# Altium PCB remote.PcbDoc (part 4 of 4)
Units mil, origin at the board's own origin, x right, y up, seen from the top; angles counter-clockwise.
Board outline 1653.54 x 3582.68 mil, 2 copper layers (Top Layer, Bottom Layer); 71 components, 53 nets, 248 pads, 250 vias.
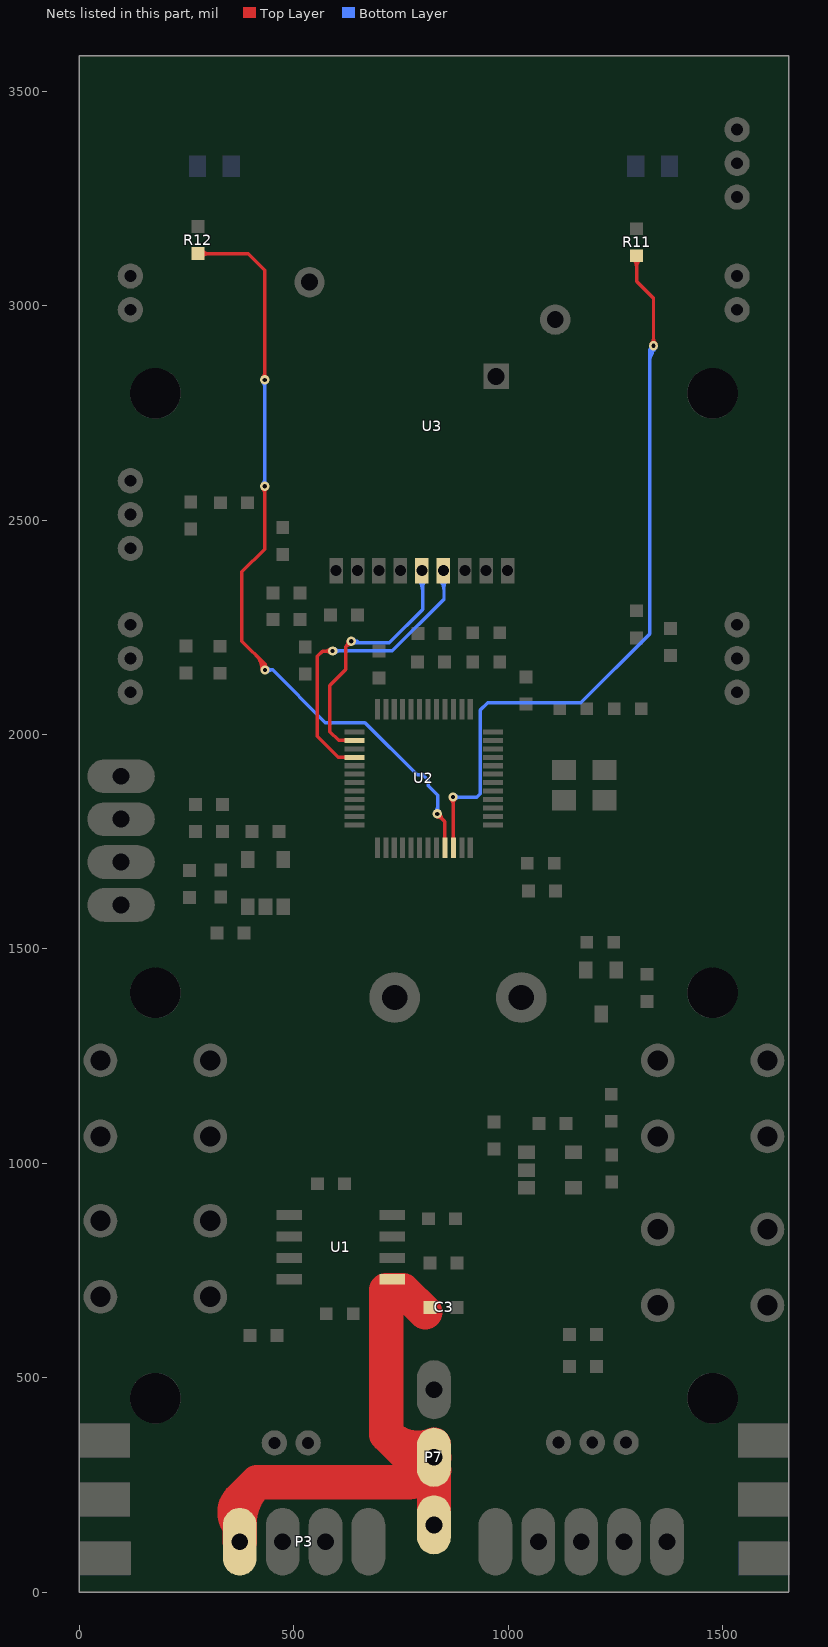
[diagram p4: the nets of this part, all layers, seen from the top]

## Via types
v1: diameter 21.65, hole 9.84, Top Layer to Bottom Layer, tented both sides, 241 vias
v2: diameter 21.65, hole 9.84, Top Layer to Bottom Layer, 9 vias

## Nets (pads, with @x,y where several pads share a name; then routed paths per layer and width w, separated by ;. In a path a pad name is that pad's centre, name@x,y a point inside that pad or via, vN(x,y) a via of type N, cw(c..) or ccw(c..) an arc to the next point about the centre after c; other vN are vias at no path point) (continued)
SPI2-MOSI: U2.28 U3.5 | length 910.9
  Top Layer w8: v1@590.55,2196.85 587.6,2193.9 566.93,2193.9 555.12,2182.09 555.12,1995.84 604.1,1946.85 U2.28@641.73,1946.85 ; 571.69,2193.9 ccw(c571.69,2213.74) 585.72,2199.71 cw(c571.69,2213.74) 571.69,2193.9 ; 576.45,2193.9 cw(c576.45,2180.78) 585.72,2190.05 ccw(c576.45,2180.78) 576.45,2193.9
  Bottom Layer w8: v1(590.55,2194.88) 729.33,2194.88 850.2,2315.75 U3.5@850.2,2389.57 ; 607.03,2194.88 cw(c607.03,2211.36) 595.38,2199.71 ccw(c607.03,2211.36) 607.03,2194.88 ; 607.03,2194.88 ccw(c607.03,2178.4) 595.38,2190.05 cw(c607.03,2178.4) 607.03,2194.88 ; U3.5@840.31,2359.8 cw(c816.46,2335.95) 850.2,2335.95 ccw(c816.46,2335.95) U3.5@840.31,2359.8 ; 850.2,2343.55 cw(c873.18,2343.55) 856.93,2359.8 ccw(c873.18,2343.55) 850.2,2343.55
SPI2-SCK: U2.26 U3.4 | length 819
  Top Layer w8: 625.22,2210.75 cw(c635.83,2207.91) v1@633.62,2218.67 ; 627.09,2208.88 ccw(c624.25,2219.49) v1@635.01,2217.28 ; v1(633.86,2217.52) 621.06,2204.72 621.06,2151.57 583.66,2114.17 583.66,2006.89 604.33,1986.22 U2.26@641.73,1986.22 ; 622.2,2205.87 cw(c633.86,2194.21) 633.86,2210.69 ccw(c633.86,2194.21) 622.2,2205.87 ; 622.2,2205.87 ccw(c610.55,2217.52) 627.03,2217.52 cw(c610.55,2217.52) 622.2,2205.87
  Bottom Layer w8: v1(633.86,2217.52) 637.8,2213.58 722.33,2213.58 800.2,2291.45 U3.4@800.2,2389.57 ; v1@639.76,2214.09 cw(c645.49,2210.77) 648.8,2216.51 ; v1@638.69,2222.35 ccw(c659.84,2243.51) 659.84,2213.58 cw(c659.84,2243.51) v1@638.69,2222.35 ; U3.4@790.31,2359.8 cw(c766.46,2335.95) 800.2,2335.95 ccw(c766.46,2335.95) U3.4@790.31,2359.8 ; 800.2,2343.55 cw(c823.18,2343.55) 806.93,2359.8 ccw(c823.18,2343.55) 800.2,2343.55
TIM4_CH3: R12.2 U2.45 | length 2446.7
  Top Layer w8: R12.2@276.57,3121.06 393.7,3121.06 432.09,3082.68 v1(432.09,2826.77) ; v1@428.77,2155.9 ccw(c424.63,2161.02) 430.99,2162.72 ccw(c439.89,2165.11) v1@435.97,2156.77 ; v1(432.09,2578.74) 432.09,2432.09 378.94,2378.94 378.94,2217.52 433.07,2163.39 ; v1(433.07,2150.59) 433.07,2163.39 ; v1@833.5,1814.73 ccw(c844.25,1816.93) 841.41,1806.32 ; v1(834.65,1814.96) 852.36,1797.24 U2.45@852.36,1736.22 ; v1@834.88,1816.11 cw(c832.68,1805.35) 843.29,1808.19 ; 303.13,3121.06 cw(c303.13,3147.62) 284.35,3128.84 ccw(c303.13,3147.62) 303.13,3121.06 ; 303.13,3121.06 ccw(c303.13,3094.51) 284.35,3113.28 cw(c303.13,3094.51) 303.13,3121.06 ; 432.09,2562.26 cw(c448.57,2562.26) 436.91,2573.91 ccw(c448.57,2562.26) 432.09,2562.26 ; 432.09,2562.26 ccw(c415.61,2562.26) 427.26,2573.91 cw(c415.61,2562.26) 432.09,2562.26 ; 432.09,2843.25 cw(c415.61,2843.25) 427.26,2831.6 ccw(c415.61,2843.25) 432.09,2843.25 ; 432.09,2843.25 ccw(c448.57,2843.25) 436.91,2831.6 cw(c448.57,2843.25) 432.09,2843.25 ; 433.07,2163.39 cw(c424.49,2163.39) 429.27,2156.26 ccw(c424.49,2163.39) 433.07,2163.39 ; 433.07,2163.39 ccw(c441.65,2163.39) 436.87,2156.26 cw(c441.65,2163.39) 433.07,2163.39 ; 846.3,1803.31 cw(c857.95,1814.96) 841.47,1814.96 ccw(c857.95,1814.96) 846.3,1803.31 ; 846.3,1803.31 ccw(c834.65,1791.65) 834.65,1808.13 cw(c834.65,1791.65) 846.3,1803.31 ; 412.37,2184.09 cw(c378.87,2150.59) 426.24,2150.59 ccw(c378.87,2150.59) 412.37,2184.09 ; 426.03,2170.43 cw(c406.19,2150.59) 434.24,2150.59 ccw(c406.19,2150.59) 426.03,2170.43
  Bottom Layer w8: v1(432.09,2578.74) v1(432.09,2826.77) ; v1(433.07,2150.59) 450.56,2150.59 573.54,2027.61 666.06,2027.61 788,1905.67 800.95,1905.67 813.15,1893.47 813.15,1880.75 835.63,1858.27 835.63,1815.94 v1(834.65,1814.96) ; 432.09,2595.22 cw(c415.61,2595.22) 427.26,2583.57 ccw(c415.61,2595.22) 432.09,2595.22 ; 432.09,2595.22 ccw(c448.57,2595.22) 436.91,2583.57 cw(c448.57,2595.22) 432.09,2595.22 ; 432.09,2810.29 cw(c448.57,2810.29) 436.91,2821.94 ccw(c448.57,2810.29) 432.09,2810.29 ; 432.09,2810.29 ccw(c415.61,2810.29) 427.26,2821.94 cw(c415.61,2810.29) 432.09,2810.29 ; 449.55,2150.59 cw(c449.55,2167.07) 437.9,2155.42 ccw(c449.55,2167.07) 449.55,2150.59 ; 449.55,2150.59 ccw(c449.55,2134.11) 437.9,2145.76 cw(c449.55,2134.11) 449.55,2150.59 ; v1@829.82,1819.79 ccw(c815.79,1833.82) 835.63,1833.82 cw(c815.79,1833.82) v1@829.82,1819.79 ; 835.63,1829.07 ccw(c848.75,1829.07) 839.47,1819.79 cw(c848.75,1829.07) 835.63,1829.07
TIM4_CH4: R11.2 U2.46 | length 2149.3
  Top Layer w8: U2.46@872.05,1736.22 v1@872.05,1846.46 ; R11.2@1299.21,3116.14 1299.21,3056.1 1338.58,3016.73 v1(1338.58,2906.5) ; 1299.21,3089.59 cw(c1325.77,3089.59) 1306.99,3108.36 ccw(c1325.77,3089.59) 1299.21,3089.59 ; 1299.21,3089.59 ccw(c1272.66,3089.59) 1291.43,3108.36 cw(c1272.66,3089.59) 1299.21,3089.59 ; 1338.58,2922.98 cw(c1322.1,2922.98) 1333.76,2911.32 ccw(c1322.1,2922.98) 1338.58,2922.98 ; 1338.58,2922.98 ccw(c1355.06,2922.98) 1343.41,2911.32 cw(c1355.06,2922.98) 1338.58,2922.98 ; v1@866.24,1849.5 cw(c852.21,1835.48) 872.05,1835.48 ccw(c852.21,1835.48) v1@866.24,1849.5 ; 872.05,1840.22 cw(c885.17,1840.22) 875.89,1849.5 ccw(c885.17,1840.22) 872.05,1840.22
  Bottom Layer w8: v1@872.05,1853.35 926.18,1853.35 935.04,1862.2 935.04,2057.09 951.77,2073.82 1169.18,2073.82 1329.72,2234.37 1329.72,2897.64 v1(1338.58,2906.5) ; 1330.33,2894.47 cw(c1339.37,2889.26) v1@1338.89,2899.68 ; 1330.73,2895.16 ccw(c1319.81,2901.47) v1@1331.99,2904.73 ; v1@1332.82,2902.83 cw(c1317.5,2893.1) 1333.22,2884.02 ; v1@1339.57,2907.13 cw(c1330.07,2901.08) 1339.82,2895.45 ; v1@875.89,1849.5 cw(c885.17,1840.23) 885.17,1853.35 ccw(c885.17,1840.23) v1@875.89,1849.5 ; v1@875.89,1859.16 ccw(c889.92,1873.19) 889.92,1853.35 cw(c889.92,1873.19) v1@875.89,1859.16 ; 1329.72,2868.63 cw(c1376.45,2868.63) 1343.41,2901.67 ccw(c1376.45,2868.63) 1329.72,2868.63 ; 1329.72,2887.94 cw(c1357.14,2887.94) 1337.75,2907.33 ccw(c1357.14,2887.94) 1329.72,2887.94
  other v1: 871.06,1854.33
VIN: C3.1 P3.1 P7.1 P7.2 U1.5 | length 2449.5
  Top Layer w80: P3.1@374.02,118.11 374.02,216.54 ; C3.1@806.32,652.78 754.37,704.72 715.55,704.72 715.55,368.11 ; P7.1@826.77,157.48 P7.2@826.77,314.96 ; 374.02,216.54 ccw(c403.99,186.56) 373.56,157.04 cw(c403.99,186.56) 374.02,216.54 ; 374.02,216.54 414.37,256.89 ; 414.37,256.89 ccw(c513.3,157.95) 373.39,157.48 cw(c513.3,157.95) 414.37,256.89 ; 414.37,256.89 768.7,256.89 ; 715.55,368.11 ccw(c790.1,442.65) 826.99,343.9 cw(c790.1,442.65) 715.55,368.11 ; 715.55,368.11 768.7,314.96 ; 768.7,256.89 ccw(c768.7,331.88) 827.26,285.04 cw(c768.7,331.88) 768.7,256.89 ; 768.7,256.89 P7.2@826.77,314.96 ; 768.7,314.96 ccw(c798.19,344.44) 827.21,314.51 cw(c798.19,344.44) 768.7,314.96 ; 768.7,314.96 P7.2@826.77,314.96 ; 759.38,256.89 ccw(c759.38,352.82) 827.22,284.99 cw(c759.38,352.82) 759.38,256.89 ; 777.44,265.63 cw(c826.77,216.3) 826.77,286.06 ccw(c826.77,216.3) 777.44,265.63
pads on no net: SP1.4 SP2.4 Y1.2 Y1.4

## Polygon pours and split planes (outlines as drawn)
GND on Top Layer "Top Layer-No Net" (solid, remove dead copper, pour order 4): 0,3582.68 1653.54,3582.68 1653.54,0.99 1653.54,0.98 1652.56,0 0,0
GND on Bottom Layer "Top Layer-No Net" (solid, remove dead copper, pour order 8): 1653.54,0 1648.62,4.92 1648.62,3585.63 2.95,3585.63 0,3582.68 0,0

## Keep-outs
Keep-Out Layer:
  lines w7.87: 0,0 1653.54,0 1653.54,3582.68 0,3582.68 0,0

## Other copper
Top Layer:
  rectangle net GND: 1465.55,42.32 1611.22,120.08
  pour cut-out: 0,3582.68 1653.54,3582.68 1653.54,2416.34 1655.51,2414.37 1625,2383.86 -0.98,2383.86
  pour cut-out: 0.49,436.02 164.86,436.02 167.81,438.98 177.66,429.13 177.17,0 104.33,0.98 0,0
  pour cut-out: 1476.87,437.01 1641.24,437.01 1644.19,439.96 1654.04,430.12 1653.54,0.98 1580.71,1.97 1476.38,0.98
  text "MC_REMOTE_STM32" at 53.15,3500.98 h30
  text "2019-03-29" at 108.27,3436.02 h30
  text "VERSION 1.2" at 105.32,3375 h30
Bottom Layer:
  rectangle net GND: 1463.58,39.37 1571.85,119.09
  pour cut-out: 1651.57,3580.71 -1.97,3580.71 -1.97,2414.37 -3.94,2412.4 26.57,2381.89 1652.56,2381.89
  pour cut-out: 176.67,436.02 12.3,436.02 9.35,438.98 -0.49,429.13 0,0 72.83,0.98 177.16,0
  pour cut-out: 1653.05,436.02 1488.68,436.02 1485.73,438.98 1475.89,429.13 1476.38,0 1549.21,0.98 1653.54,0

## Silkscreen, mask and mechanical layers (free items; w line width, h text height)
Top Overlay:
  lines w10: 167.32,1981.3 167.32,1953.74 ; 189.96,1857.28 189.96,1825.79 ; 192.91,1953.74 167.32,1953.74 ; 215.55,1825.79 189.96,1825.79 ; 233.14,2019.56 167.32,1953.74 ; 310.04,1945.87 189.96,1825.79 ; 581.69,2428.15 581.69,2637.8 ; 610.24,1490.16 654.53,1490.16 ; 620.08,2589.57 606.3,2603.35 605.32,2603.35 ; 621.06,2620.08 605.32,2604.33 605.32,2603.35 ; 632.87,1457.68 632.87,1518.7 ; 634.84,2427.17 634.84,2523.62 ; 680.12,2460.63 661.42,2479.33 659.45,2479.33 ; 681.1,2501.97 659.45,2480.31 659.45,2479.33 ; 682.09,2603.35 605.32,2603.35 ; 765.75,2479.33 659.45,2479.33 ; 856.3,2603.35 933.07,2603.35 ; 894.69,2479.33 977.36,2479.33 994.09,2479.33 994.09,2480.31 979.33,2495.08 ; 915.35,2620.08 932.09,2603.35 933.07,2603.35 ; 918.31,2587.6 933.07,2602.36 933.07,2603.35 ; 930.12,2603.35 933.07,2603.35 ; 964.57,2436.02 964.57,2659.45 ; 981.3,2466.54 991.14,2476.38 988.19,2479.33 988.19,2486.22 ; 1003.94,2422.24 1003.94,2512.8
  text "NOPA" at 695.87,2586.61 h40
  text "PA" at 800.2,2457.68 h40
  text "GND" at 244.09,2027.56 h40
  text "SWIO" at 321.85,1955.71 h40
  text "4V3" at 43.31,1500 h40

## Text inside footprints (layer, text, board x,y; h text height)
U2: Top Overlay "STM32" at 736.22,1883.86 h32
U3: Bottom Overlay "GT-24" at 774.57,3385 h86.61